# Altium PCB ControlBoard.PcbDoc
Units mil, origin at the board's own origin, x right, y up, seen from the top; angles counter-clockwise.
Board outline 2850 x 2080 mil, 2 copper layers (Top Layer, Bottom Layer); 38 components, 21 nets, 125 pads, 0 vias.
Unrouted connection lines stored in the file: 67.
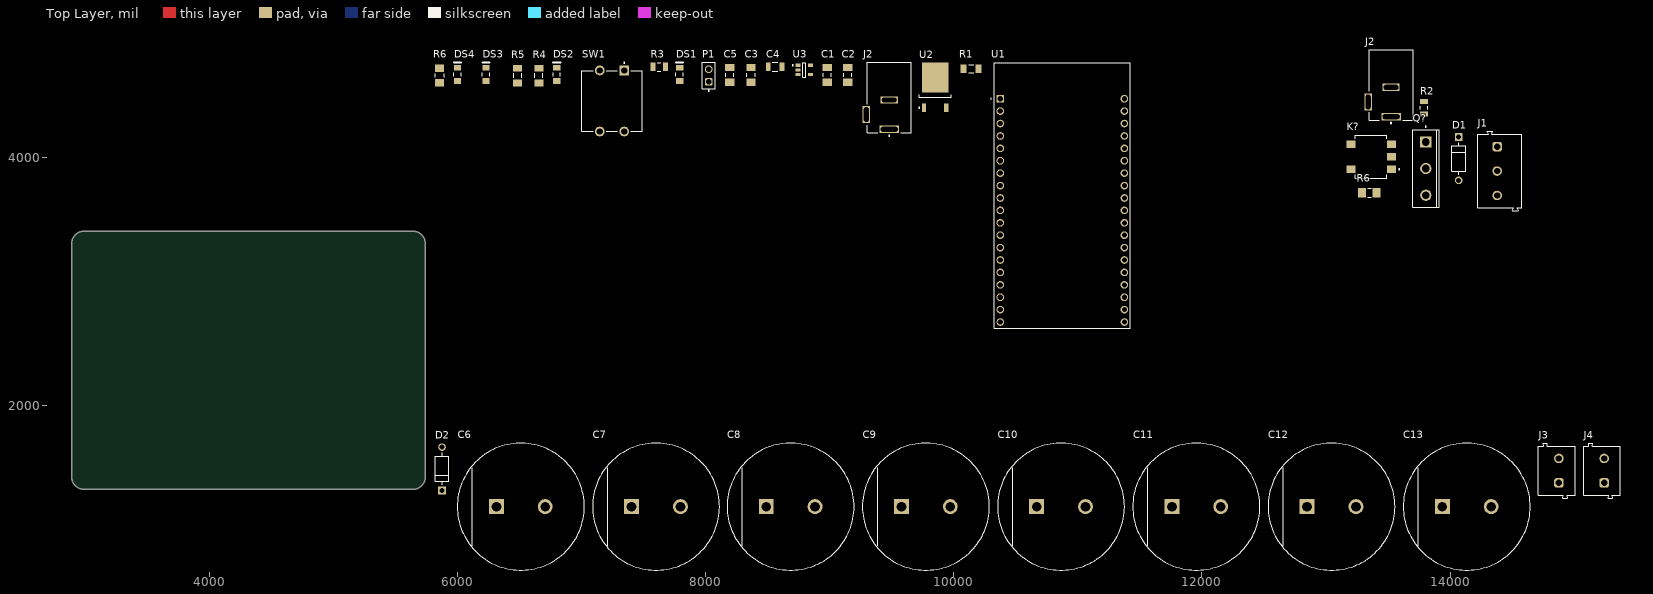
[diagram p0: Top Layer view]
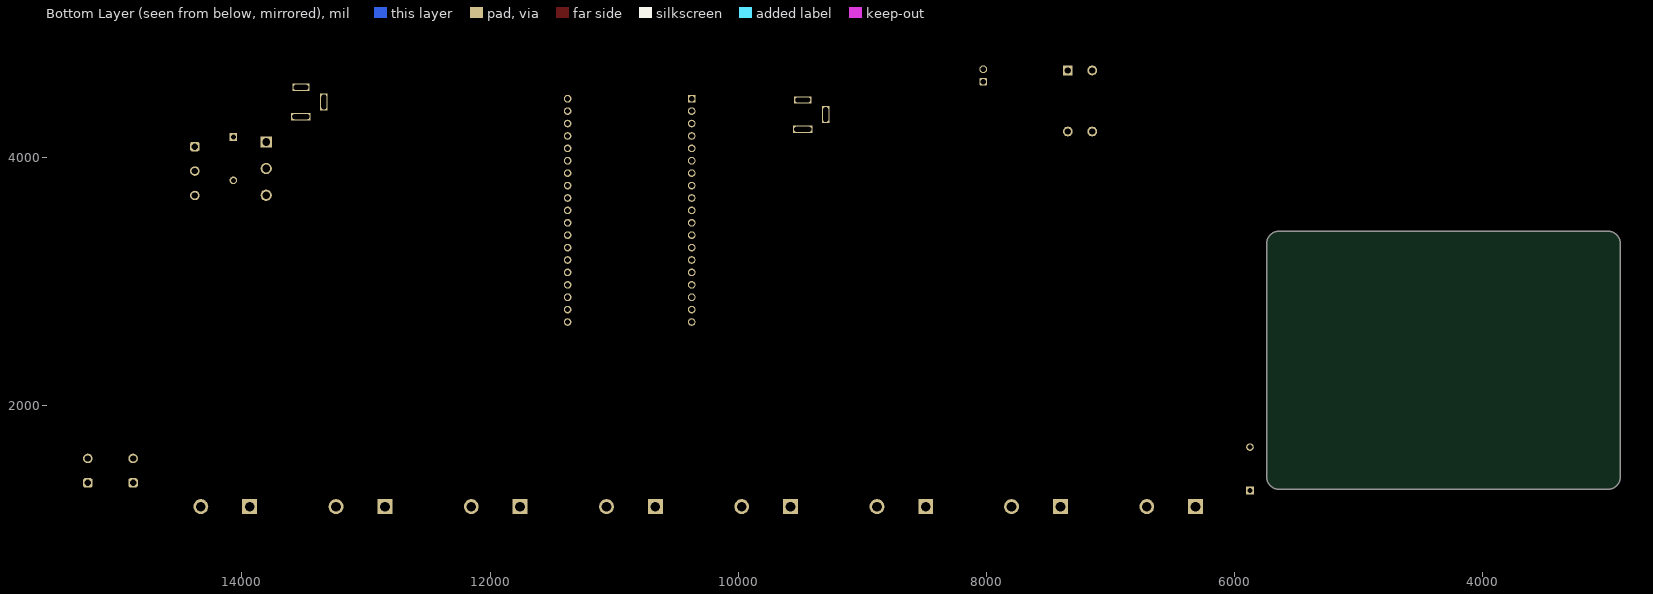
[diagram p1: Bottom Layer view, seen from below]

## Layer stack, top to bottom
Top Solder: solder mask 0.4, Solder Resist, Dk 3.5
Top Layer: signal copper 1.4
Dielectric 1: dielectric 12.6, FR-4, Dk 4.8
Bottom Layer: signal copper 1.4
Bottom Solder: solder mask 0.4, Solder Resist, Dk 3.5

## Board outline
2890,1425 2890,3305 cw(c2990,3305) 2990,3405 5640,3405 cw(c5640,3305) 5740,3305 5740,1425 cw(c5640,1425) 5640,1325 2990,1325 cw(c2990,1425)

## Design rules (kind name [scope] priority, off if disabled: settings)
Clearance [All] p1: gap=10 ignorepadtopadclearanceinfootprint=FALSE
PolygonConnect [All] p1: connectstyle=Relief reliefconductorwidth=10 reliefentries=4 polygonreliefangle="90 Angle" airgapwidth=10
RoutingVias [All] p1: holewidth=28 width=50 viastyle="Through Hole" minholewidth=28 minwidth=50 maxholewidth=28 maxwidth=50
SolderMaskExpansion [All] p1: expansion=4 istentingtop=FALSE
SupplyNets "Schematic Supply Nets_7" [InNet('GND3')] p1: voltage=0.000
SupplyNets "Schematic Supply Nets_6" [InNet('GND2')] p2: voltage=0.000
SupplyNets "Schematic Supply Nets_5" [InNet('9V2')] p3: voltage=0.000
SupplyNets "Schematic Supply Nets_3" [InNet('250V')] p4: voltage=0.000
SupplyNets "Schematic Supply Nets_4" [InNet('3V3')] p5: voltage=0.000
SupplyNets "Schematic Supply Nets" [InNet('GND')] p6: voltage=0.000
SupplyNets "Schematic Supply Nets_2" [InNet('9V')] p7: voltage=0.000
SupplyNets "Schematic Supply Nets_1" [InNet('5V')] p8: voltage=0.000
Width [All] p1: maxlimit=50 minlimit=25 preferedwidth=25 minimp=50.000000 maximp=50.000000 favimp=50.000000
30 further rules are at their usual default settings.

## Classes and differential pairs
component class CapacitorBank: C6 C7 C8 C9 C10 C11 C12 C13 D2 J3 J4
component class ControlBoard: C1 C2 C3 C4 C5 D1 DS1 DS2 DS3 DS4 J1 J2 K? P1 Q? R1 R2 R3 R4 R5 R6 SW1 U1 U2 U3

## Components (designator, comment, footprint, x,y, rotation, side; value= is the part's Value field where it differs from the comment)
C1 "0.1uF" KEMT-1206-2_M 8980,4665 r90 top
C2 "0.1uF" KEMT-1206-2_M 9145,4665 r90 top
C3 "0.1uF" KEMT-1206-2_M 8365,4665 r90 top
C4 "100uF" FP-C1206C-EH-MFG 8560,4730 r0 top
C5 "0.1uF" KEMT-1206-2_M 8195,4665 r90 top
C6 "450VXH150MEFCSN25X30" FP-VXH25X30-MFG 6510,1185 r0 top
C7 "450VXH150MEFCSN25X30" FP-VXH25X30-MFG 7600,1185 r0 top
C8 "450VXH150MEFCSN25X30" FP-VXH25X30-MFG 8685,1185 r0 top
C9 "450VXH150MEFCSN25X30" FP-VXH25X30-MFG 9775,1185 r0 top
C10 "450VXH150MEFCSN25X30" FP-VXH25X30-MFG 10865,1185 r0 top
C11 "450VXH150MEFCSN25X30" FP-VXH25X30-MFG 11955,1185 r0 top
C12 "450VXH150MEFCSN25X30" FP-VXH25X30-MFG 13045,1185 r0 top
C13 "450VXH150MEFCSN25X30" FP-VXH25X30-MFG 14135,1185 r0 top
D1 "1N4007" FP-1N4007-MFG 14070,3990 r270 top value=15pF
D2 "1N4007" FP-1N4007-MFG 5875,1490 r90 top value=15pF
DS1 "LED" LUMX-SML-LX1206YC-TR_V 7790,4670 r90 top
DS2 "LED" LUMX-SML-LX1206YC-TR_V 6800,4670 r90 top
DS3 "LED" LUMX-SML-LX1206YC-TR_V 6230,4670 r90 top
DS4 "LED" LUMX-SML-LX1206YC-TR_V 6000,4670 r90 top
J1 "691101710003" 691101710003 14400,3890 r270 top
J2 "DC Jack" CUI-PJ-002A_V 9480,4345 r90 top
J2 "DC Jack" CUI-PJ-002A_V 13525,4446.89 r90 top
J3 "691102710002" 691102710002 14860,1475 r90 top
J4 "691102710002" 691102710002 15225,1475 r90 top
K? "APV1122A" FP-APV1122A-MFG 13365,4005 r180 top
P1 "61300211121" 61300211121 8025,4660 r90 top
Q? "IRFP460PBF" VISH-TO-247AC-3 13805,3910 r0 top
R1 "10Ω" RESC3116X65X40ML10T20 10140,4715 r0 top
R2 "10kΩ" RESC3116X65X50LL20T20 13790,4400 r270 top
R3 "590Ω" FP-CRCW1206-e3-MFG 7625,4730 r0 top
R4 "330Ω" FP-CRCW1206-e3-IPC_A 6655,4660 r90 top
R5 "330Ω" FP-CRCW1206-e3-IPC_A 6485,4660 r90 top
R6 "220Ω" FP-RMCF1206-IPC_A 13350,3715 r0 top
R6 "220Ω" FP-RMCF1206-IPC_A 5855,4660 r90 top
SW1 "Momentary" FP-FSM103-MFG 7245,4455 r90 top
U1 "ESP32-DEVKITC-32D" MODULE_ESP32-DEVKITC-32D 10875,3695 r0 top
U2 "L78M05CDT-TR" TO-252_L 9850,4565 r90 top
U3 "MIC5504-3.3YM5-TR" FP-SOT23-5LD-PL-1-MFG 8795,4705 r0 top

## Footprints (in the part's own frame and the unit in brackets; to place one, negate y for a bottom-side part, rotate by r counter-clockwise, add the part's x,y. Pads: shape width x height; smd on the part's side, far side on the other; paste and mask are expansions set on the pad)
61300211121 [mm] "Pin Header, pitch 2.54 mm, THT, Vertical, single row, 2p"
  rrect50% 1.6x1.6 hole 1.1: 1(-1.27,0)
  round 1.6 hole 1.1: 2(1.27,0)
  silkscreen extent -3.26,-1.35 2.69,1.35, body extent -2.54,-1.27 2.54,1.27, height 8.57
691101710003 [mm] "5,00mm - modular - blue - Horizontal entry with pressure clamp - 12,6mm height - 03p"
  rrect50% 1.95x1.95 hole 1.3: 1(-5,-0.5)
  round 1.95 hole 1.3: 2(0,-0.5) 3(5,-0.5)
  silkscreen extent -8.1,-4.5 8.1,4.5, body extent -8.1,-4.5 8.1,4.5, height 12.65
691102710002 [mm] "5,00mm - modular - blue - Horizontal entry with pressure clamp - 9,9 mm height - 02p"
  rrect50% 1.95x1.95 hole 1.3: 1(-2.5,-0.45)
  round 1.95 hole 1.3: 2(2.5,-0.45)
  silkscreen extent -5.6,-3.75 5.6,3.75, body extent -5.6,-3.75 5.6,3.75, height 9.96
CUI-PJ-002A_V [mm] "THD, 3-Leads, Body 14.4x9mm, Height 11mm"
  rect 1.5x4 hole 1 slot 3.5 at 90 deg: 1(-3,0)
  rect 1.5x3.5 hole 1 slot 3 at 90 deg: 2(3,0)
  rect 3.5x1.5 hole 1 slot 3 at 0 deg: 3(0,4.7)
  silkscreen extent -4.42,-4.5 10.7,4.5, body extent -3.7,-4.5 10.7,4.9, height 11
FP-1N4007-MFG [mm]
  rect 1.55x1.55 hole 1 paste-2539.97 mask+0: 1(-4.44,0)
  round 1.55 hole 1 paste-2539.97 mask+0: 2(4.44,0)
  silkscreen extent -3.26,-1.4 3.26,1.4, body extent -5.32,-1.5 5.32,1.5, height 0.25
FP-APV1122A-MFG [mm]
  rect 1.9x1.5 smd paste+0 mask+0: 1(-4.15,2.54) 2(-4.15,0) 3(-4.15,-2.54) 4(4.15,-2.54) 6(4.15,2.54)
  silkscreen extent -5.83,-4.43 3.22,4.43, body extent -5.2,-4.52 5.2,4.52, height 0.25
FP-C1206C-EH-MFG [mm]
  rect 0.95x1.7 smd paste+0 mask+0: 1(-1.4,0) 2(1.4,0)
  silkscreen extent -0.55,-0.9 0.55,0.9, body extent -2,-1 2,1, height 0.25
FP-CRCW1206-e3-IPC_A [mil]
  rect 53.39x73.16 smd paste+0 mask+0: 1(-60.08,0) 2(60.08,0)
  silkscreen extent -19,-31 19,31, body extent -106,-56 106,56, height 10
FP-CRCW1206-e3-MFG [mm]
  rect 1.05x1.8 smd paste+0 mask+0: 1(-1.275,0) 2(1.275,0)
  silkscreen extent -0.38,-0.87 0.38,0.87, body extent -1.9,-1 1.9,1, height 0.25
FP-FSM103-MFG [mm]
  rect 2x2 hole 1.3 paste-2539.97 mask+0: 1(6.25,-2.5)
  round 2 hole 1.3 paste-2539.97 mask+0: 2(-6.25,-2.5) 3(6.25,2.5) 4(-6.25,2.5)
  silkscreen extent -6.15,-6.15 7.92,6.15, body extent -7.35,-6.25 7.35,6.25, height 0.25
FP-RMCF1206-IPC_A [mil]
  rect 63.14x73.16 smd paste+0 mask+0: 1(-58.09,0) 2(58.09,0)
  silkscreen extent -15,-37 15,37, body extent -109,-56 109,56, height 10
FP-SOT23-5LD-PL-1-MFG [mm]
  rect 1x0.66 smd paste+0 mask+0: 1(-1.3,0.95) 2(-1.3,0) 3(-1.3,-0.95) 4(1.3,-0.95) 5(1.3,0.95)
  silkscreen extent -2.47,-1.5 0.35,1.5, body extent -1.9,-1.6 1.9,1.6, height 0.25
FP-VXH25X30-MFG [mm]
  rect 3.05x3.05 hole 2 paste-2539.97 mask+0: 1(-5,0)
  round 3.05 hole 2 paste-2539.97 mask+0: 2(5,0)
  silkscreen extent -13,-13 13,13, body extent -13.1,-13.1 13.1,13.1, height 0.25
KEMT-1206-2_M [mm] "SMD, 2-Leads, Body 3.4x1.8mm, IPC Low Density"
  rect 1.5x1.9 smd: 1(-1.5,0) 2(1.5,0)
  silkscreen extent -0.35,-0.85 0.35,0.85, body extent -1.7,-0.9 1.7,0.9, height 0.88
LUMX-SML-LX1206YC-TR_V [mm] "SMD, 2-Leads, Body 3.2x1.5mm"
  rect 1.2x1.5 smd: 1(-1.35,0) 2(1.35,0)
  silkscreen extent -0.35,-0.75 2.45,0.75, body extent -1.6,-0.75 1.6,0.75, height 1.25
MODULE_ESP32-DEVKITC-32D [mm]
  rect 1.56x1.56 / inner round 1.56 / far side rect 1.56x1.56 hole 1.04: J2-1(-12.7,19.76)
  round 1.56 hole 1.04: J2-2(-12.7,17.22) J2-3(-12.7,14.68) J2-4(-12.7,12.14) J2-5(-12.7,9.6) J2-6(-12.7,7.06) J2-7(-12.7,4.52) J2-8(-12.7,1.98) J2-9(-12.7,-0.56) J2-10(-12.7,-3.1) J2-11(-12.7,-5.64) J2-12(-12.7,-8.18) J2-13(-12.7,-10.72) J2-14(-12.7,-13.26) J2-15(-12.7,-15.8) J2-16(-12.7,-18.34) J2-17(-12.7,-20.88) J2-18(-12.7,-23.42) J2-19(-12.7,-25.96) J3-1(12.7,19.76) J3-2(12.7,17.22) J3-3(12.7,14.68) J3-4(12.7,12.14) J3-5(12.7,9.6) J3-6(12.7,7.06) J3-7(12.7,4.52) J3-8(12.7,1.98) J3-9(12.7,-0.56) J3-10(12.7,-3.1) J3-11(12.7,-5.64) J3-12(12.7,-8.18) J3-13(12.7,-10.72) J3-14(12.7,-13.26) J3-15(12.7,-15.8) J3-16(12.7,-18.34) J3-17(12.7,-20.88) J3-18(12.7,-23.42) J3-19(12.7,-25.96)
  silkscreen extent -14.7,-27.25 13.95,27.15, body extent -13.97,-27.9 13.97,27.2, height 6.69
RESC3116X65X40ML10T20 [mm] "Chip Resistor, 2-Leads, Body 3.10x1.60mm, IPC Low Density"
  rect 1.25x1.8 smd: 1(-1.525,0) 2(1.525,0)
  silkscreen extent -0.5,-0.8 0.5,0.8, body extent -1.6,-0.85 1.6,0.85, height 0.65
RESC3116X65X50LL20T20 [mm] "Chip Resistor, 2-Leads, Body 3.10x1.60mm, IPC High Density"
  rect 1.05x1.7 smd: 1(-1.275,0) 2(1.275,0)
  silkscreen extent -0.35,-0.75 0.35,0.75, body extent -1.65,-0.9 1.65,0.9, height 0.65
TO-252_L [mm] "D-PAK, 4-Leads, Body 6.1x6.5mm, Pitch 2.28mm, Lead Span 9.7mm, IPC High Density"
  rect 1.8x0.9 smd: 1(-4.2,2.28) 3(-4.2,-2.28)
  rect 6.2x5.45 smd: 4(2,0)
  silkscreen extent -4.32,-3.3 -1.5,3.4, body extent -2.05,-3.3 4.15,3.3, height 2.4
VISH-TO-247AC-3 [mm] "FM, 3-Leads, Body 15.9x5.35mm, Pitch 5.46mm"
  rect 2.3x2.3 hole 1.6: 1(0,5.46)
  round 2.3 hole 1.6: 2(0,0) 3(0,-5.46)
  silkscreen extent -2.67,-7.95 2.74,8.72, body extent -2.64,-7.95 2.71,7.95, height 25.11

## Part data
C1 C2 C3 C5: library part CMP-1037-04202-2, "CAP, Ceramic, 0.1 uF, +/- 10%, 50 V, -55 to 125 degC, 1206 (3216 Metric), RoHS, Tape and Reel", Capacitance=0.1µF, Capacitance Tolerance=±10%, Capacitor Case Style=1206[3216Metric], Dielectric Characteristic=X7R, Manufacturer=Kemet, Operating Temperature Max=125degC, Operating Temperature Min=-55degC, Package Description="2-Leads SMD, Body 3.2 x 1.6 mm", Package Reference=1206-2, Voltage Rating=50V, Datasheet URL=https://datasheet.ciiva.com/6125/1725438-6125494.pdf, Datasheet Version=Jul-13, Manufacturer URL=http://www.kemet.com/, Packaging=Tape&Reel, Product Range=KEMET-CSeries, SVHC=ToBeAdvised
C4: library part CMP-1037-05005-3, "CAP CER 100UF 6.3V X5R 1206", Case Code (Imperial)=1206, Case Code (Metric)=3216, Dielectric=X5R, Dielectric Material=Ceramic, Max Operating Temperature=85°C, Min Operating Temperature=-55°C, Package Quantity=1, Tolerance=2%, Voltage=6.3V, Capacitance=100uF, Case/Package=1206, Construction=Flat, Depth=1.6mm, Dissipation Factor=5%, Height=1.6mm, Lead Free="Lead Free", Length=3.2mm, Mount="Surface Mount", Number of Pins=2, Packaging="Tape and Reel", Radiation Hardening=No, REACH SVHC="No SVHC", RoHS Compliant=Yes, Series=C, Termination=SMD/SMT, Thickness=0.071inch, Voltage Rating=6.3V, Voltage Rating (DC)=6.3V, Width=0.063inch
C6 C7 C8 C9 C10 C11 C12 C13: library part CMP-01474-28338259-1, "450VXH150MEFCSN25X30 Cap Alum 150UF 20% 450V Snap", Capacitance=150µF, Case/Package=Radial, Leakage Current=779.42µA, Max Operating Temperature=105°C, Min Operating Temperature=-25°C, Ripple Current=1.12A, Tolerance=20%, Voltage Rating=450V, Dissipation Factor=20%, Height=32mm, Height - Seated (Max)=32.004mm, Lead Pitch=10.0076mm, Life (Hours)=5000hours, Mount="Through Hole", NexarPartId=28338259, Packaging=Bulk, Polarity=Polar, RoHS=Compliant
D1 D2: library part CMP-123542-000001-1, "Rectifier diode 1000 V 1 A DO-41, ,", Capacitance=15pF, Forward Current=1A, Manufacturer=Diotec, Max Junction Temp=+175°C, Max Repetitive Reverse Voltage=1000V, Max Surge Forward Current=27A, Peak Reverse Current=5uA, Temperature="-50°C to +175°C", Temperature Range Low=-50°C, Automotive=No, Category=Diode, ComponentLink2Description=Datasheet, ComponentLink2URL=https://datasheet.octopart.com/1N4007-Diotec-datasheet-62346875.pdf, Device Class L1="Discrete Semiconductors", Device Class L2=Diodes, Device Class L3="Rectifier Diodes", Height=2.8mm, Ipc Land Pattern Name=DIOAD888W100L520D280, Lead Free=Yes, Manufacturer Part Number=1N4007, Octopart=https://octopart.com/1n4007-diotec-4040411, Package=1N4007, Reverse Voltage=1000V, RoHS=TRUE, Temperature Range High=+175°C
DS1 DS2 DS3 DS4: library part CMP-2000-07124-1, "Yellow LED, Water Clear Len, 585 nm, 2.1 V, -40 to 85 degC, 2-Pin SMD, RoHS, Tape and Reel", Color=Yellow, Current - Test=20mA, Lens Color=Colorless, Manufacturer=Lumex, Millicandela Rating=6mcd, Package / Case=1206(3216Metric), Package Description="2-Pin Surface Mount Device, Body 3.2 x 1.5 mm", Package Reference=SML-LX1206YC-TR, Standard Package=3,000, Supplier Device Package=1206, Voltage - Forward (Vf) (Typ)=2.1V, Catalog Drawings=SML-LX1206SeriesTopSML-LX1206SeriesSideSML-LX1206SeriesBottomSML-LX1206SeriesFootprint, Category=Optoelectronics, Datasheet URL=http://www.lumex.com/content/files/ProductAttachment/SML-LX1206YC-TR.pdf, Datasheet Version="Rev. K, 08/2012", Family=LEDIndication-Discrete, Features=-, Height (Max)=1.10mm, Lens Style/Size=RectanglewithFlatTop, Lens Transparency=Clear, Manufacturer URL=http://www.lumexinstruments.com/, Mounting Technology=SurfaceMount, Mounting Type=SurfaceMount, Online Catalog=SML-LX1206RectanglewithFlatTop1206PackageLEDs, Other Names=67-1358-2LU60357TRSMLLX1206YCTR, Packaging=Tape&Reel(TR), Product Training Modules=LEDsBenefitsofCustomLEDandLCDTechnology, RoHS Information=RoHSCertofCompliance, Series=-, Size / Dimension=3.20mmLx1.60mmW, Viewing Angle=160°, Wavelength - Dominant=-, Wavelength - Peak=585nm
J1: library part CMP-1502-03257-2, Color=Blue, Current=16A, Max Operating Temperature=105°C, Min Operating Temperature=-40°C, Voltage=250V, Contact Material=Brass, Contact Plating=Tin, Current Rating=16A, Height=16.4mm, Housing Material=Nylon, Lead Pitch=5mm, Length=9mm, Mount="Through Hole", NexarPartId=8917705, Number of Contacts=3, Number of Levels=1, Number of Pins=3, Number of Positions Per Level=3, Packaging=Box, Pitch=5.0038mm, Plating=Steel, REACH SVHC=Unknown, RoHS=Compliant, Stripping Length=-7mm, Termination=Screw, Voltage Rating=250V, Width=16.2mm, Wire Gauge (Max)=26AWG, Wire Gauge (Min)=14AWG, Wire/Cable Gauge=26AWG
J2 J2: library part CMP-2000-06895-2, "Through Hole Right Angle DC Power Jack, 2.5 A, 2 mm Center Pin, 3 Position, -25 to 85 degC, RoHS, Bulk", Current Rating=2.5A, Flammability Rating=UL94V-0, Insulation Resistance=50MOhms, Manufacturer=CUIInc., Operating Temperature Range=-25Cto+85C, Package Description="3-Pin Through Hole Device, Body 14.4 x 9 mm, Height 11 mm", Package Reference=PJ-002A, Voltage Rating=24V, Brand=CUI, Connector Type=DCPowerJack, Contact Gender=Male, Contact Material=Copper, Contact Plating=Nickel, Datasheet URL=http://www.cui.com/product/resource/pj-002a.pdf, Datasheet Version="Rev. 1.03, 04/2016", Factory Pack Quantity=500, Housing Material=PolybutyleneTerephthalate(PBT), Inside Contact Diameter=2mm, Manufacturer URL=http://www.cui.com/, Mounting Angle=Right, Mounting Style=ThroughHole, Mounting Technology=ThroughHole, Outside Contact Diameter=6.5mm, Product=Jacks, Product Category=DCPowerConnectors, RoHS=True, Termination Style=ThroughHole
J3 J4: library part CMP-1502-03258-2, Color=Blue, Current=15A, Max Operating Temperature=105°C, Min Operating Temperature=-40°C, Voltage=300V, Contact Material=Brass, Contact Plating=Tin, Current Rating=15A, Height=13.4mm, Housing Material=Nylon, Lead Pitch=5mm, Length=7.5mm, Mount="Through Hole", NexarPartId=8917706, Number of Contacts=2, Number of Levels=1, Number of Pins=2, Number of Positions Per Level=2, Packaging=Box, Pitch=5.0038mm, Plating=Steel, REACH SVHC=Unknown, RoHS=Compliant, Stripping Length=-6mm, Termination=Screw, Voltage Rating=300V, Width=11.2mm, Wire Gauge (Max)=22AWG, Wire Gauge (Min)=14AWG, Wire/Cable Gauge=22AWG
K?: library part CMP-00287-00907340-1, "APV1122A APV Series 50 mA 5 Vr 75 mW Photovoltaic Mosfet Driver - DIP-6", Ambient Temperature Range High=85°C, Capacitance=800fF, Case/Package=SMD/SMT, Forward Current=50mA, Forward Voltage=1.5V, Input Current=30mA, Isolation Voltage=5kV, Max Junction Temperature (Tj)=125°C, Max Output Current=1A, Max Output Voltage=8.7V, Max Power Dissipation=75mW, Max Supply Voltage=5V, Min Operating Temperature=-40°C, Output Current=14µA, Height=4.1mm, Lead Free="Lead Free", Max Operating Temperature=85°C, Mount="Surface Mount", NexarPartId=907340, Number of Channels=1, Number of Contacts=1, Number of Elements=1, Number of Pins=6, Output Current per Channel=14µA, Output Voltage=8.7V, Power Dissipation=75mW, REACH SVHC=Unknown, Reverse Breakdown Voltage=5V, Reverse Voltage (DC)=5V, RoHS=Compliant, Schedule B="8541408000, 8541408000"
P1: library part CMP-1712-00002-6, Color=Black, Contact Resistance=20mΩ, Current Rating=3A, Max Operating Temperature=125°C, Min Operating Temperature=-40°C, Operating Supply Voltage=250V, Connector Type="Male Pin", Contact Gender=Male, Contact Material=Copper, Contact Mating Length=5.9944mm, Contact Plating=Gold, Gender=Male, Height=8.94mm, Housing Material=PBT, Lead Free="Lead Free", Lead Pitch=2.54mm, Mount="Through Hole", NexarPartId=20081794, Number of Contacts=2, Number of Pins=2, Number of Positions=2, Number of Rows=1, Orientation=Vertical, Packaging=Bulk, Pitch=2.54mm, REACH SVHC="No SVHC", RoHS=Compliant, Termination="Through Hole", Voltage Rating=250V
Q?: library part CMP-2000-06478-1, "N-Channel Power MOSFET, 500 V, -55 to 150 degC, 3-Pin FM (TO-247), RoHS, Tube", Continuous Drain Current Id=20A, Drain Source Voltage Vds=500V, Manufacturer=Vishay, On Resistance Rds(on)=0.27ohm, Operating Temperature Max=150°C, Package Description="3-Pin Flange Mount Package, Body 15.58 x 4.945 mm, Pitch 5.46 mm", Package Reference=TO-247AC-3, Power Dissipation Pd=280W, Rds(on) Test Voltage Vgs=10V, Threshold Voltage Vgs=4V, Transistor Case Style=TO-247AC, Automotive Qualification Standard=-, Datasheet URL=https://datasheet.ciiva.com/17070/0900766b8079122f-17070730.pdf, Datasheet Version="Rev. A, 07/2008", Manufacturer URL=http://www.vishay.com/, Mounting Technology=ThroughHole, MSL=-, No. of Pins=3Pins, Product Range=-, SVHC=ToBeAdvised, Transistor Polarity=NChannel
R1: library part CMP-2100-03677-1, "Chip Resistor, 10 Ohm, +/- 1%, 0.25 W, -55 to 155 degC, 1206 (3216 Metric), RoHS, Tape and Reel", Case Code (Imperial)=1206, Case Code (Metric)=3216, Manufacturer=Yageo, Max Operating Temperature=155degC, Max Power Dissipation=250mW, Min Operating Temperature=-55degC, Package Description="2-Pin Surface Mount Device, Body 3.1 x 1.6 mm", Package Quantity=1, Package Reference=1206.0, Resistance=10Ohm, Temperature Coefficient=200ppm/degreesC, Tolerance=1%, Voltage Rating=200V, Case/Package=1206, Composition=ThickFilm, Datasheet URL=http://www.yageo.com/NewPortal/yageodocoutput?fileName=/pdf/R-Chip/PYu-RC_Group_51_RoHS_L_5.pdf, Datasheet Version="Rev. 5, 10/2016", Depth=1.6mm, Height=0.026inch, Lead Free=LeadFree, Length=3.1mm, Manufacturer URL=http://www.yageo.com/, Military Standard=Not, Number of Pins=2, Number of Terminations=2, Packaging=TapeandReel, Power Rating=250mW, REACH SVHC=Unknown, RoHSCompliant=true, Termination=SMD/SMT, Voltage Rating (DC)=200V, Width=0.063inch
R2: library part CMP-2003-04880-1, Manufacturer="Vishay Dale", Part Number=CRCW12061K00JNEAHP
R3: library part CMP-2003-02292-2, "RES Thick Film, 590Ω, 1%, 0.25W, 100ppm/°C, 1206", Case Code (Imperial)=1206, Case Code (Metric)=3216, Max Operating Temperature=155°C, Max Power Dissipation=250mW, Min Operating Temperature=-55°C, Package Quantity=10, Resistance=590R, Temperature Coefficient=100ppm/°C, Tolerance=1%, Voltage Rating=200V, Case/Package=1206, Composition="Thick Film", Contact Plating=Tin, Depth=1.6mm, Features="Automotive AEC-Q200", Height=0.024inch, Lead Free="Lead Free", Length=3.2mm, Military Standard=Not, Number of Pins=2, Number of Terminations=2, Packaging="Tape and Reel", Power Rating=250mW, Radiation Hardening=No, Termination=SMD/SMT, Voltage Rating (DC)=200V, Weight=0.000353oz, Width=0.063inch
R4 R5: library part CMP-2003-02098-2, "RES Thick Film, 330Ω, 1%, 0.25W, 100ppm/°C, 1206", Case Code (Imperial)=1206, Case Code (Metric)=3216, Max Operating Temperature=155°C, Max Power Dissipation=250mW, Min Operating Temperature=-55°C, Package Quantity=10, Resistance=330R, Temperature Coefficient=100ppm/°C, Tolerance=1%, Voltage Rating=200V, Case/Package=1206, Composition="Thick Film", Contact Plating=Tin, Depth=1.6mm, Features="Automotive AEC-Q200", Height=0.55mm, Lead Free="Lead Free", Length=3.2mm, Military Standard=Not, Mount="Surface Mount", Number of Terminations=2, Packaging="Tape and Reel", Power Rating=250mW, Radiation Hardening=No, Termination=SMD/SMT, Voltage Rating (DC)=200V, Weight=0.000353oz, Width=1.6mm
R6 R6: library part CMP-26527-004145-1, "220Ω ±5% 0.25W 1206 Thick Film Chip Resistor AEC-Q200 compliant", Case Code (Imperial)=1206, Case Code (Metric)=3216, Max Operating Temperature=155°C, Max Power Dissipation=250mW, Min Operating Temperature=-55°C, Resistance=220R, Resistor Type="Thick Film", Temperature Coefficient=200ppm/°C, Tolerance=5%, Case/Package=1206, Construction=Rectangular, Contact Plating=Tin, Depth=1.6mm, Features="Automotive AEC-Q200", Height=0.028inch, Lead Free="Lead Free", Length=0.126inch, Military Standard=Not, Mount="Surface Mount", Number of Terminations=2, Packaging="Tape and Reel", Power Rating=250mW, Radiation Hardening=No, RoHS Compliant=Yes, Series=RMCF, Size Code=1206, Width=0.063inch
SW1: library part CMP-03407-000037-1, "SWITCH TACTILE SPST-NO 0.05A 24V", Actuator Color=Black, Contact Current Rating=50mA, Contact Resistance=100mR, Max Operating Temperature=85°C, Max Voltage Rating (DC)=12V, Min Operating Temperature=-35°C, Operating Force=1.57N, Package Quantity=400, Voltage Rating=24V, Actuator Length=3.4mm, Actuator Material=Polyester, Contact Material=Brass, Contact Plating=Silver, Current Rating=50mA, Depth=14.1mm, Electrical Life=100000Cycles, Illumination Type=Non-Illuminated, Length=12mm, Max Current Rating=50mA, Mechanical Life=100000Cycles, Mount="Through Hole", Orientation=Straight, Packaging="Loose Piece", Radiation Hardening=No, RoHS Compliant=Yes, Series="FSM100 ~ 104", Switch Function=Off-Mom, Switch Travel=0.3mm, Termination="PC Pins", Throw Configuration=SPST, Type=Switch, Voltage Rating (DC)=12V, Width=12mm
U1: library part CMP-039-000000-A.1, "WiFi Development Tools (802.11) ESP32 General Development Kit, ESP32-WROOM-32D on the board", Package=None, Check_prices=https://www.snapeda.com/parts/ESP32-DEVKITC-32D/Espressif+Systems/view-part/?ref=eda, Component Type=Standard, Design Item ID=ESP32-DEVKITC-32D, MF="Espressif Systems", MP=ESP32-DEVKITC-32D, Pin Count=38, SnapEDA_Link=https://www.snapeda.com/parts/ESP32-DEVKITC-32D/Espressif+Systems/view-part/?ref=snap, Source=ESP32-DEVKITC-32D.SchLib
U2: library part CMP-0244-00178-1, "Positive Voltage Regulator, 5V, 3-Pin DPAK, Tape and Reel", ComponentLink1Description="Manufacturer URL", ComponentLink1URL=http://www.st.com, ComponentLink2Description=Datasheet, ComponentLink2URL=http://www.st.com/internet/com/TECHNICAL_RESOURCES/TECHNICAL_LITERATURE/DATASHEET/CD00000447.pdf, DatasheetVersion=1/11/2010, PackageDescription="3-Pin Transistor Outline Package 2.28 mm Pitch, 9.7 mm Lead Span (DPAK)", PackageReference=TO-252, PackageVersion=2011
U3: library part CMP-2000-07604-2, "IC REG LINEAR 3.3V 300MA SOT23-5", Case/Package=SOT-23-5, Dropout Voltage=380mV, Max Input Voltage=5.5V, Max Operating Temperature=125°C, Max Output Current=300mA, Min Input Voltage=2.5V, Min Operating Temperature=-40°C, Nominal Output Voltage=3.3V, Operating Supply Current=42uA, Power Supply Rejection Ratio (PSRR)=60dB, Quiescent Current=38uA, Accuracy=3%, Height=1.1mm, Length=2.9mm, Mount="Surface Mount", Number of Outputs=1, Number of Pins=5, Output Current=300mA, Output Type=Fixed, Output Voltage=3.3V, Packaging="Tape and Reel", REACH SVHC="No SVHC", Width=1.6mm

## Nets (pads, with @x,y where several pads share a name; then routed paths per layer and width w, separated by ;. In a path a pad name is that pad's centre, name@x,y a point inside that pad or via, vN(x,y) a via of type N, cw(c..) or ccw(c..) an arc to the next point about the centre after c; other vN are vias at no path point)
3V3: C3.1 C4.1 R6.1@5855,4601.91 U1.J2-1 U3.5
5V: C2.1 C5.1 R4.1 U2.3 U3.1 U3.3
9V: C1.1 J2.1@9480,4226.89 R3.1 U2.1
9V2: J2.1@13525,4328.78 K?.6
250V: D2.2 J3.2
"Coil +": D1.1 J1.1
"Coil -": D1.2 J1.2 Q?.2
Gate: K?.1 R1.2
GND: C1.2 C2.2 C3.2 C4.2 C5.2 DS1.2 DS2.2 DS3.2 DS4.2 J2.2@9480,4463.11 P1.2 R6.1@13291.91,3715 SW1.3 U1.J2-14 U1.J3-1 U1.J3-7 U2.4 U3.2
GND2: J1.3 J2.2@13525,4565 Q?.3 R2.1
GND3: C6.1 C7.1 C8.1 C9.1 C10.1 C11.1 C12.1 C13.1 J3.1 J4.2
Indicator: R5.1 U1.J3-9
NetC6_2: C6.2 C7.2 C8.2 C9.2 C10.2 C11.2 C12.2 C13.2 D2.1 J4.1
NetDS1_1: DS1.1 R3.2
NetDS2_1: DS2.1 R4.2
NetDS3_1: DS3.1 R5.2
NetDS4_1: DS4.1 R6.2@5855,4718.09
NetK?_2: K?.2 R6.2@13408.09,3715
NetK?_4: K?.4 Q?.1 R2.2
NetR1_1: R1.1 U1.J3-2
Trigger: P1.1 SW1.1 U1.J3-13
pads on no net: J2.3 K?.3 SW1.2 SW1.4 U1.J2-2 U1.J2-3 U1.J2-4 U1.J2-5 U1.J2-6 U1.J2-7 U1.J2-8 U1.J2-9 U1.J2-10 U1.J2-11 U1.J2-12 U1.J2-13 U1.J2-15 U1.J2-16 U1.J2-17 U1.J2-18 U1.J2-19 U1.J3-3 U1.J3-4 U1.J3-5 U1.J3-6 U1.J3-8 U1.J3-10 U1.J3-11 U1.J3-12 U1.J3-14 U1.J3-15 U1.J3-16 U1.J3-17 U1.J3-18 U1.J3-19 U3.4